# EAGLE board v3-quadcopter-control-board (EAGLE 6.2)
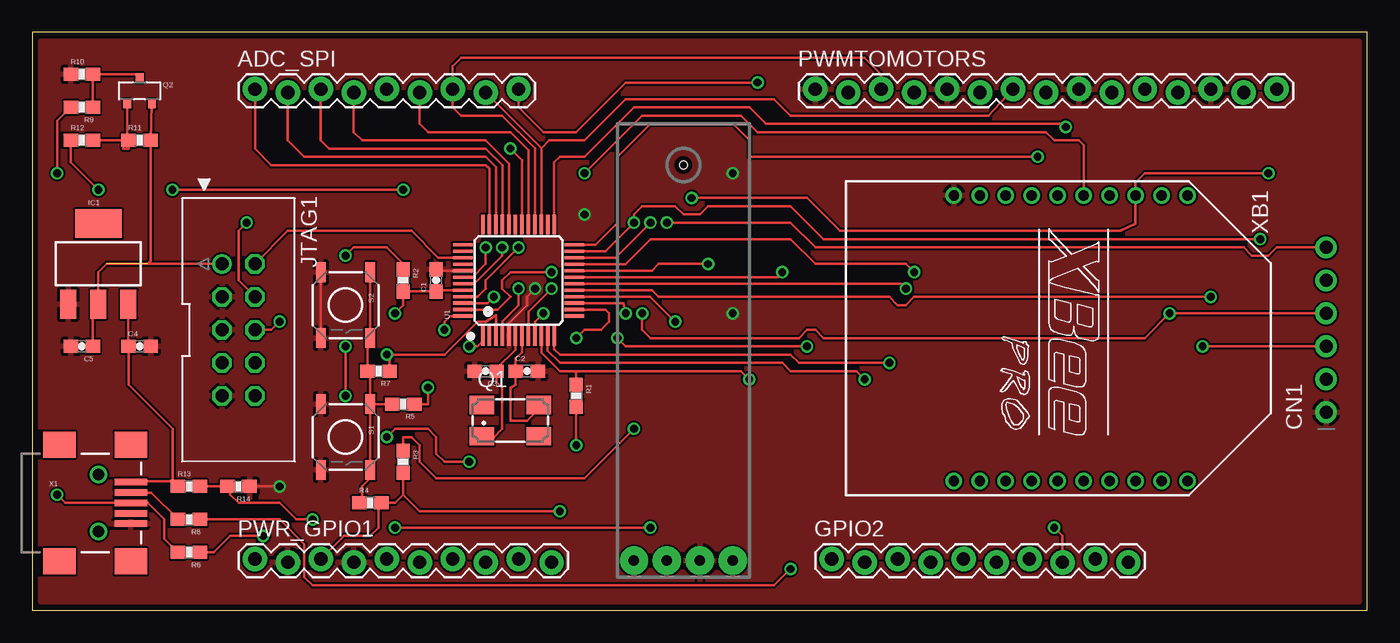
[diagram p0: board, top side]
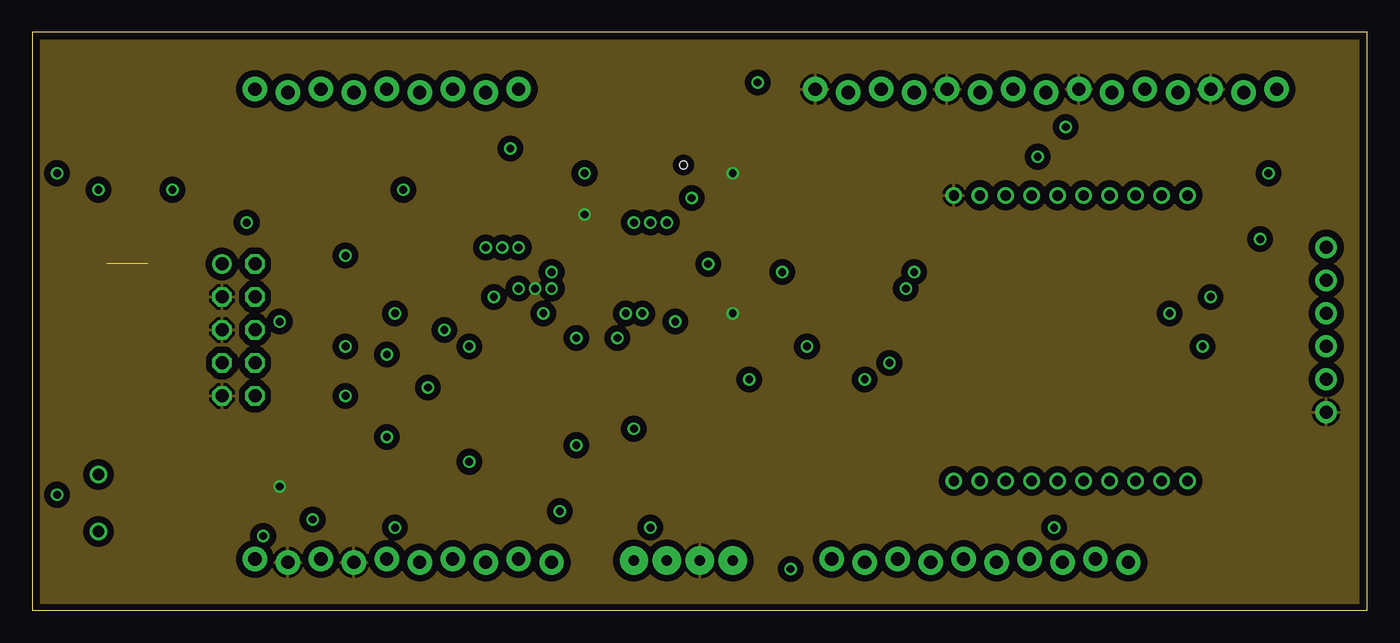
[diagram p1: board, inner layer GND$]
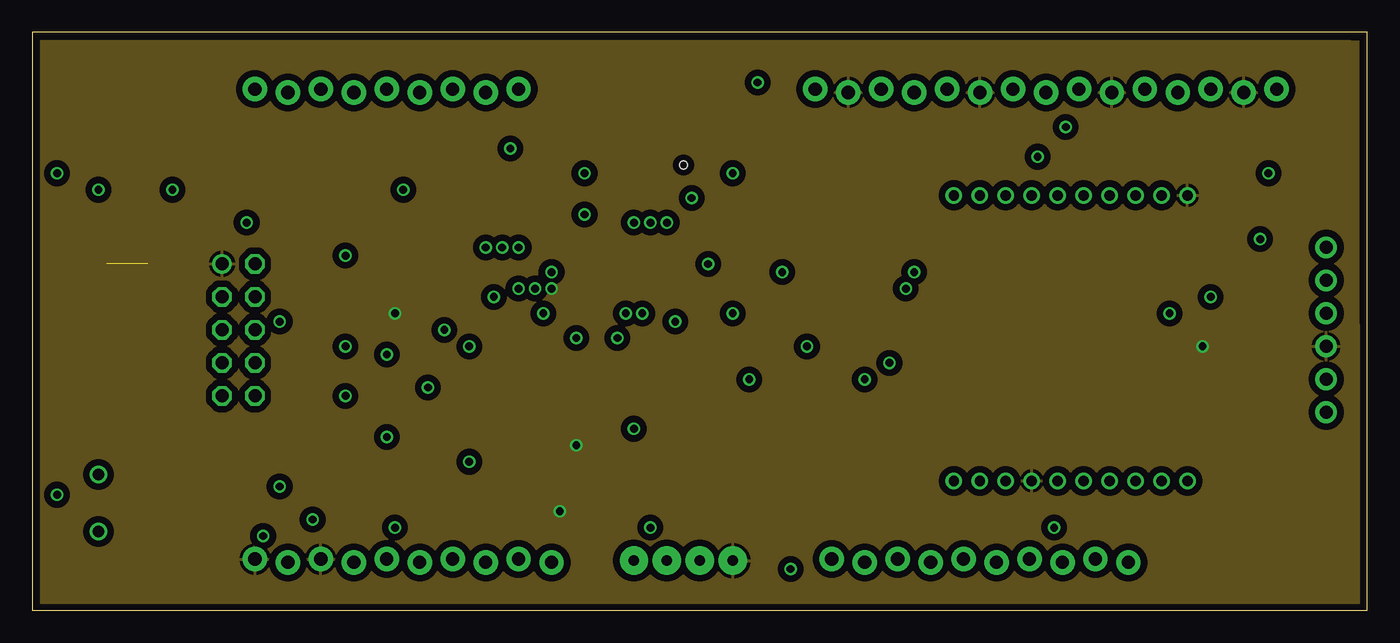
[diagram p2: board, inner layer 3.3V$]
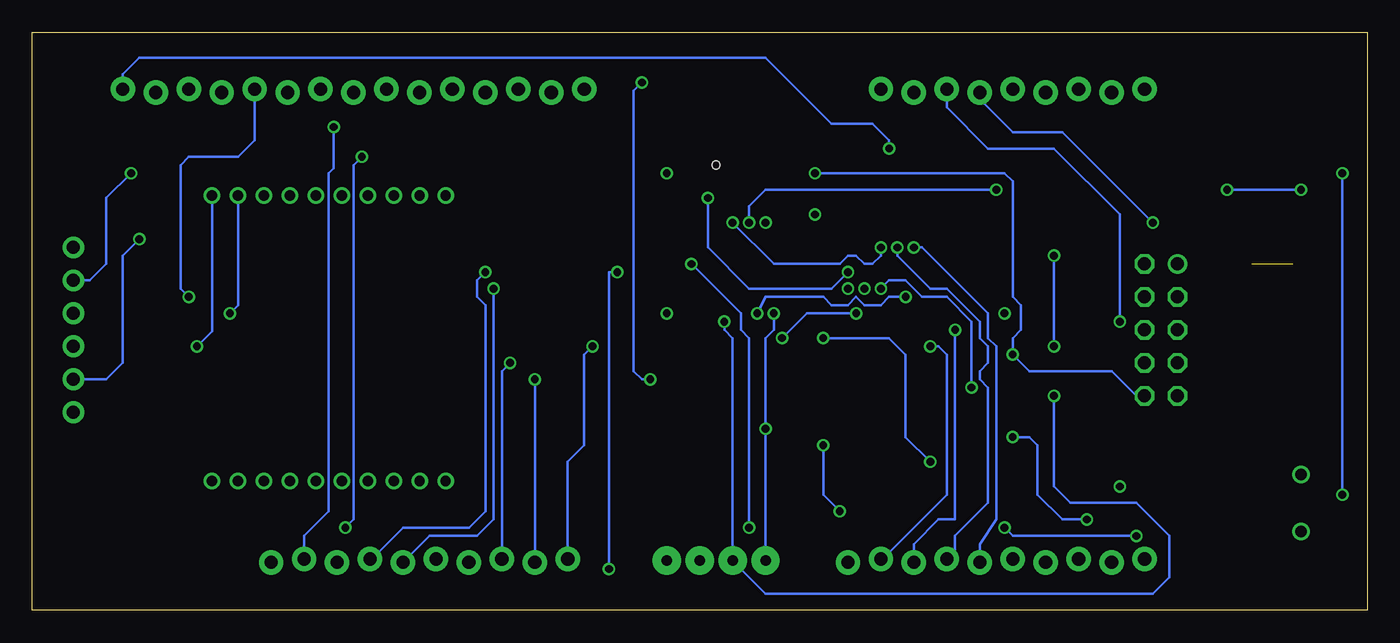
[diagram p3: board, bottom side, seen from below]

Size 102.85 x 44.5 mm. Coordinates in mm from the lower left corner, seen from the top.
Outline: 0,0 102.85,0 102.85,44.5 0,44.5 0,0
Copper layers (1*2)+(3*16): Top 0.0356mm / dielectric 1.5011mm / GND$ 0.0356mm / dielectric 0.1499mm / 3.3V$ 0.0356mm / dielectric 0.2007mm / Bottom 0.0356mm
Design rules: minimum track width 6mil, minimum drill 13mil, track to track 6mil, track to pad 6mil, pad to pad 6mil, via to via 6mil, smd to smd 6mil, copper to edge 15mil, drill to drill 6mil, minimum pad ring 7mil, minimum via ring 7mil, stop-mask expansion 4mil, vias tented up to drill 0mil, thermal gap 10mil

## Footprints (pad centres in the part's own frame; a part is rotated, then mirrored left to right if it is on the bottom)
SPARKFUN-9DOF = drill 0.8 pad 2.184: GND 1.27,3.81; SCL 1.27,8.89; SDA 1.27,6.35; VCC 1.27,1.27 | hole 0.6: 31.75,5.08
1X09_LOCK = drill 1.016 pad 1.88: 1 0,0.127; 2 2.54,-0.127; 3 5.08,0.127; 4 7.62,-0.127; 5 10.16,0.127; 6 12.7,-0.127; 7 15.24,0.127; 8 17.78,-0.127; 9 20.32,0.127
0603-CAP = smd 1.1 x 1: 1 -0.85,0; 2 0.85,0
1X06_ROUND = drill 1 pad 1.676: 1 -6.35,0; 2 -3.81,0; 3 -1.27,0; 4 1.27,0; 5 3.81,0; 6 6.35,0
1X10_LOCK = drill 1.016 pad 1.88: 1 0,0.127; 2 2.54,-0.127; 3 5.08,0.127; 4 7.62,-0.127; 5 10.16,0.127; 6 12.7,-0.127; 7 15.24,0.127; 8 17.78,-0.127; 9 20.32,0.127; 10 22.86,-0.127
SOT223 = smd 1.219 x 2.235: 1 -2.311,-3.099; 2 0,-3.099; 3 2.311,-3.099 | smd 3.6 x 2.2: 4 0,3.099
CORTEXM3_SWD10_MOLEX = drill 1: 1 -5.08,-1.27 | drill 1 octagon: 2 -5.08,1.27; 3 -2.54,-1.27; 4 -2.54,1.27; 5 0,-1.27; 6 0,1.27; 7 2.54,-1.27; 8 2.54,1.27; 9 5.08,-1.27; 10 5.08,1.27
1X15_LOCK = drill 1.016 pad 1.88: 1 0,0.127; 2 2.54,-0.127; 3 5.08,0.127; 4 7.62,-0.127; 5 10.16,0.127; 6 12.7,-0.127; 7 15.24,0.127; 8 17.78,-0.127; 9 20.32,0.127; 10 22.86,-0.127; 11 25.4,0.127; 12 27.94,-0.127; 13 30.48,0.127; 14 33.02,-0.127; 15 35.56,0.127
CTS406 = smd 1.9 x 1.4: 1 -2.2,-1.2; 2 2.2,-1.2; 3 2.2,1.2; 4 -2.2,1.2
SOT23-R = smd 0.6 x 0.7: 1 -0.95,-1; 2 0.95,-1; 3 0,1
0603-RES = smd 1.1 x 1: 1 -0.85,0; 2 0.85,0
TACTILE_SWITCH_SMD = smd 1.524 x 0.762: 1 -2.54,1.905; 2 2.54,1.905; 3 -2.54,-1.905; 4 2.54,-1.905
LQFP48 = smd 1.5 x 0.25: 1 -4.3,2.75; 2 -4.3,2.25; 3 -4.3,1.75; 4 -4.3,1.25; 5 -4.3,0.75; 6 -4.3,0.25; 7 -4.3,-0.25; 8 -4.3,-0.75; 9 -4.3,-1.25; 10 -4.3,-1.75; 11 -4.3,-2.25; 12 -4.3,-2.75; 25 4.3,-2.75; 26 4.3,-2.25; 27 4.3,-1.75; 28 4.3,-1.25; 29 4.3,-0.75; 30 4.3,-0.25; 31 4.3,0.25; 32 4.3,0.75; 33 4.3,1.25; 34 4.3,1.75; 35 4.3,2.25; 36 4.3,2.75 | smd 0.25 x 1.5: 13 -2.75,-4.3; 14 -2.25,-4.3; 15 -1.75,-4.3; 16 -1.25,-4.3; 17 -0.75,-4.3; 18 -0.25,-4.3; 19 0.25,-4.3; 20 0.75,-4.3; 21 1.25,-4.3; 22 1.75,-4.3; 23 2.25,-4.3; 24 2.75,-4.3; 37 2.75,4.3; 38 2.25,4.3; 39 1.75,4.3; 40 1.25,4.3; 41 0.75,4.3; 42 0.25,4.3; 43 -0.25,4.3; 44 -0.75,4.3; 45 -1.25,4.3; 46 -1.75,4.3; 47 -2.25,4.3; 48 -2.75,4.3
USB-MINIB-NOSTOP = smd 2.5 x 0.5: D+ 2.5,0; D- 2.5,0.8; GND 2.5,-1.6; ID 2.5,-0.8; VBUS 2.5,1.6 | smd 2.5 x 2: G1 -3,-4.5; G2 -3,4.5; G3 2.5,4.5; G4 2.5,-4.5 | drill 0.9 pad 0.8: H1 0,2.2 | drill 0.9 pad 0.787: H2 0,-2.2
XBEE-PRO = drill 0.8 pad 1.27: 1 -11,9; 2 -11,7; 3 -11,5; 4 -11,3; 5 -11,1; 6 -11,-1; 7 -11,-3; 8 -11,-5; 9 -11,-7; 10 -11,-9; 11 11,-9; 12 11,-7; 13 11,-5; 14 11,-3; 15 11,-1; 16 11,1; 17 11,3; 18 11,5; 19 11,7; 20 11,9

## Placement (x,y rotation side)
9DOF-SPARKFUN  SEN-10724STD  [SPARKFUN-9DOF]  55.24,2.54 90 top
ADC_SPI  M09LOCK  [1X09_LOCK]  17.14,40.01 0 top
C1  10uF  [0603-CAP]  31.11,25.4 90 top
C2  16pF  [0603-CAP]  38.1,18.41 0 top
C3  16pF  [0603-CAP]  34.92,18.41 180 top
C4  16pF  [0603-CAP]  8.26,20.32 0 top
C5  16pF  [0603-CAP]  3.81,20.32 180 top
CN1  [1X06_ROUND]  99.69,21.59 90 top
GPIO2  M10LOCK  [1X10_LOCK]  61.59,3.81 0 top
IC1  [SOT223]  5.08,26.67 0 top
JTAG1  JTAG  [CORTEXM3_SWD10_MOLEX]  15.88,21.59 270 top
PWMTOMOTORS  M15LOCK  [1X15_LOCK]  60.33,40.01 0 top
PWR_GPIO1  M10LOCK  [1X10_LOCK]  17.14,3.81 0 top
Q1  12MHz  [CTS406]  36.83,14.61 0 top
Q2  [SOT23-R]  8.26,40.01 0 top
R1  10k  [0603-RES]  41.91,16.51 270 top
R2  10k  [0603-RES]  28.57,25.4 270 top
R3  10k  [0603-RES]  28.57,11.43 270 top
R4  10k  [0603-RES]  26.04,8.26 0 top
R5  470  [0603-RES]  28.57,15.88 180 top
R6  33  [0603-RES]  12.06,4.45 180 top
R7  470  [0603-RES]  26.67,18.41 180 top
R8  33  [0603-RES]  12.06,6.99 180 top
R9  1.5k  [0603-RES]  3.81,38.73 180 top
R10  150  [0603-RES]  3.81,41.27 0 top
R11  10k  [0603-RES]  8.26,36.2 0 top
R12  2k  [0603-RES]  3.81,36.2 0 top
R13  10k  [0603-RES]  12.06,9.53 0 top
R14  100k  [0603-RES]  15.88,9.53 180 top
S1  RESET  [TACTILE_SWITCH_SMD]  24.13,13.34 270 top
S2  ISP  [TACTILE_SWITCH_SMD]  24.13,23.5 270 top
U1  [LQFP48]  37.47,25.4 90 top
X1  USB-SMD-NS  [USB-MINIB-NOSTOP]  5.08,8.26 0 top
XB1  XBEE-PRO  [XBEE-PRO]  80.01,20.95 270 top

## Library data of the parts
9DOF-SPARKFUN = wicker
ADC_SPI C1-C5 GPIO2 IC1 PWMTOMOTORS PWR_GPIO1 R1-R14 S1 S2 X1 = sparkfun
CN1 JTAG1 Q2 XB1 = microbuilder
Q1 = crystal
U1 = microbuilder; DIGIKEY#: 568-4945-ND; MANF: NXP; MANF#: LPC1343FBD48,151

## Nets
3.3V: 9DOF-SPARKFUN.VCC C1.1 C5.1 CN1.3 IC1.2 JTAG1.1 PWMTOMOTORS.2 PWMTOMOTORS.6 PWMTOMOTORS.10 PWMTOMOTORS.14 PWR_GPIO1.1 PWR_GPIO1.3 Q2.2 R1.2 R2.2 R3.2 R4.2 R11.2 U1.8 U1.44 XB1.1 XB1.14
5V: C4.1 IC1.3 R13.1 X1.VBUS
AD0: ADC_SPI.4 U1.32
AD1: ADC_SPI.3 U1.33
AD2: ADC_SPI.2 U1.34
AD3: ADC_SPI.1 U1.35
CTS: CN1.2 U1.23
GND: 9DOF-SPARKFUN.GND C1.2 C2.2 C3.2 C4.2 C5.2 CN1.1 IC1.1 JTAG1.3 JTAG1.5 JTAG1.9 PWMTOMOTORS.1 PWMTOMOTORS.5 PWMTOMOTORS.9 PWMTOMOTORS.13 PWR_GPIO1.2 PWR_GPIO1.4 R10.1 R14.1 S1.3 S1.4 S2.3 S2.4 U1.5 U1.41 X1.GND XB1.10
ISP: R5.1 U1.4
MISO: ADC_SPI.8 PWMTOMOTORS.7 U1.27
MOSI: ADC_SPI.7 JTAG1.6 PWMTOMOTORS.3 U1.28
N$1: R6.2 R9.2 X1.D+
N$2: R8.2 X1.D-
N$4: Q2.3 R9.1 R10.2
N$5: Q2.1 R11.1 R12.2
N$7: R4.1 R5.2 R7.2 S1.1 S1.2 S2.1 S2.2
PIO1_8: GPIO2.1 U1.9
PIO1_11: PWR_GPIO1.6 U1.42
PIO2_4: GPIO2.6 U1.18
PIO2_5: GPIO2.7 U1.21
PIO2_6: PWR_GPIO1.9 U1.1
PIO2_7: GPIO2.2 U1.11
PIO2_8: GPIO2.3 U1.12
PIO2_9: GPIO2.8 U1.24
PIO2_10: GPIO2.9 U1.25
PIO3_2: PWR_GPIO1.7 U1.43
PIO3_3: PWR_GPIO1.8 U1.48
PWM_C: PWMTOMOTORS.11 U1.17
PWM_D: PWMTOMOTORS.15 U1.30
RESET: JTAG1.10 R7.1 U1.3 XB1.5
RTS: CN1.6 U1.45
RXD: CN1.4 U1.46 XB1.2
SCL: 9DOF-SPARKFUN.SCL R3.1 U1.15
SDA: 9DOF-SPARKFUN.SDA R2.1 U1.16
SSEL: ADC_SPI.9 R1.1 U1.10
SWCLK: ADC_SPI.6 JTAG1.4 U1.29
SWD: JTAG1.2 U1.39
TXD: CN1.5 U1.47 XB1.3
USB_D+: R6.1 U1.20
USB_D-: R8.1 U1.19
USBCON: R12.1 U1.22
USBVBUS: R13.2 R14.2 U1.14
XTAL1: C3.1 Q1.1 U1.6
XTAL2: C2.1 Q1.3 U1.7

## Tracks (layer width: path | path; a pad name or v marks a point on that pad's centre or on a via)
3.3V  (via drill 0.6)  (1 unrouted)
  Top 0.203: v41.91,12.7 R1.2 | R4.2 27.94,8.26 28.57,8.89 | 28.57,8.89 R3.2 | PWR_GPIO1.3 24,5.71 26.04,5.71 26.67,6.35 26.67,8.04 | Q2.2 R11.2 9.11,26.89 8.89,26.67 | C5.1 4.66,23.15 IC1.2 5.08,26.04 5.71,26.67 8.89,26.67 | JTAG1.1 8.89,26.67 | v40.64,7.62 29.84,7.62 28.57,8.89 | v27.94,22.86 28.57,23.5 R2.2 C1.1 31.21,24.65 U1.44 | v90.17,20.32 CN1.3 | U1.8 38.22,22.98 v40.01,24.77
  Bottom 0.203: v41.91,12.7 41.91,8.89 v40.64,7.62 | XB1.1 89.01,21.48 v90.17,20.32
  pour 3.3V$ (isolate 0.508): 0.64,0.34 102.23,0.34 102.22,43.8 101.6,43.81 0.64,43.87
5V
  Top 0.203: IC1.3 7.39,20.33 C4.1 7.41,17.36 10.79,13.97 10.79,9.95 | 10.79,9.95 R13.1 10.88,9.86 | 10.79,9.95 7.67,9.95 X1.VBUS
AD0
  Top 0.203: U1.32 36.72,34.41 34.92,36.2 25.4,36.2 24.77,36.83 ADC_SPI.4
AD1
  Top 0.203: U1.33 36.22,34.27 34.92,35.56 22.86,35.56 22.23,36.2 ADC_SPI.3
AD2
  Top 0.203: U1.34 35.72,34.13 34.92,34.92 20.95,34.92 19.68,36.2 ADC_SPI.2
AD3
  Top 0.203: ADC_SPI.1 17.14,35.56 18.41,34.29 34.92,34.29 35.22,34 U1.35
CTS  (via drill 0.6)
  Top 0.203: U1.23 44.16,27.65 v46.35,29.84 46.35,30.48 46.99,31.11 49.53,31.11 50.16,30.48 51.44,30.48 52.07,31.11 58.42,31.11 60.96,28.57 v94.61,28.57
  Bottom 0.203: v94.61,28.57 95.89,27.3 95.89,19.05 97.16,17.78 CN1.2
GND  (via drill 0.6, 0.6 pad 0.2)
  Top 0.203: C1.2 31.21,26.15 U1.41 31,26.15 | S2.4 S2.3 | U1.5 36.72,22.11 38.1,23.5 38.1,24.13 v38.73,24.77 | R14.1 v19.05,9.53
  other vias: 53.98,33.66 53.98,22.86 42.55,30.48
  pour Top: 0.64,43.81 102.23,43.81 102.23,0.64 0.64,0.64
  pour GND$ (isolate 0.508): 0.64,0.34 102.22,0.34 102.22,43.87 0.64,43.87
ISP  (via drill 0.6)
  Top 0.203: v30.48,17.14 30.48,15.88 R5.1 | U1.4 36.22,22.25 37.47,23.5 v37.47,24.77
  Bottom 0.203: v30.48,17.14 30.48,22.23 32.38,24.13 34.29,24.13 35.56,25.4 36.83,25.4 v37.47,24.77
MISO
  Top 0.203: 39.22,35.59 U1.27 | 39.22,35.59 ADC_SPI.8 | PWMTOMOTORS.7 73.66,38.1 58.42,38.1 57.15,39.37 45.72,39.37 42.55,36.2 39.82,36.2 39.22,35.59
MOSI  (via drill 0.6)
  Top 0.203: U1.28 38.72,35.58 36.2,38.1 33.02,38.1 32.38,38.73 ADC_SPI.7 32.38,41.91 33.02,42.55 64.14,42.55 65.41,41.27 PWMTOMOTORS.3 | JTAG1.6 18.41,21.59 v19.05,22.23
  Bottom 0.203: v19.05,22.23 19.05,30.48 24.13,35.56 29.21,35.56 32.38,38.73 ADC_SPI.7
N$1  (via drill 0.6)
  Top 0.203: R6.2 10.16,5.5 10.16,6.99 8.89,8.26 X1.D+ 2.54,8.26 v1.91,8.89 | v1.91,33.66 1.91,37.68 R9.2
  Bottom 0.203: v1.91,8.89 v1.91,33.66
N$2
  Top 0.203: X1.D- 9.14,9.05 R8.2
N$4
  Top 0.203: Q2.3 8.26,41.27 R10.2 R9.1
N$5
  Top 0.203: R12.2 6.99,36.2 6.99,35.56 7.41,35.56 | 7.41,35.56 R11.1 | Q2.1 7.3,35.66 7.41,35.56
N$7
  Top 0.203: R4.1 25.4,8.47 25.4,9.53 26.04,10.16 S1.2 S1.1 | S1.1 26.04,18.2 R7.2 25.82,20.74 S2.2 S2.1 | S1.1 R5.2
PIO1_8  (via drill 0.6)
  Top 0.203: U1.9 38.72,22.2 v39.37,22.86 | v45.09,20.95 45.72,20.32 v59.69,20.32
  Bottom 0.203: GPIO2.1 61.59,11.43 60.33,12.7 60.33,19.68 v59.69,20.32 | v39.37,22.86 43.18,22.86 v45.09,20.95
PIO1_11  (via drill 0.6)
  Top 0.203: U1.42 33.91,25.65 34.92,26.67 v34.92,27.94
  Bottom 0.203: v34.92,27.94 34.29,27.94 29.21,22.86 29.21,20.95 28.57,20.32 28.57,6.99 29.84,5.08 PWR_GPIO1.6
PIO2_4  (via drill 0.6)
  Top 0.203: U1.18 66.92,25.15 v67.31,24.77
  Bottom 0.203: v67.31,24.77 67.31,6.99 68.58,5.71 72.26,5.71 GPIO2.6
PIO2_5  (via drill 0.6)
  Top 0.203: U1.21 45.7,26.65 47.62,28.57 58.42,28.57 60.33,26.67 67.31,26.67 v67.94,26.04
  Bottom 0.203: GPIO2.7 76.71,3.94 74.3,6.35 69.22,6.35 67.94,7.62 67.94,23.5 68.58,24.13 68.58,25.4 v67.94,26.04
PIO2_6  (via drill 0.6)
  Top 0.203: U1.1 34.72,20.75 34.29,20.32 v33.66,20.32
  Bottom 0.203: PWR_GPIO1.9 37.34,3.94 32.38,8.89 32.38,19.68 33.02,20.32 v33.66,20.32
PIO2_7  (via drill 0.6)
  Top 0.203: U1.11 39.72,19.98 40.64,19.05 57.78,19.05 58.42,18.41 63.5,18.41 v64.14,17.78
  Bottom 0.203: v64.14,17.78 GPIO2.2
PIO2_8  (via drill 0.6)
  Top 0.203: U1.12 40.22,20.11 40.64,19.68 58.42,19.68 59.05,19.05 v66.04,19.05
  Bottom 0.203: v66.04,19.05 66.67,18.41 GPIO2.3
PIO2_9  (via drill 0.6)
  Top 0.203: U1.24 43.39,28.15 45.09,29.84 45.09,34.92 47.62,37.47 53.98,37.47 55.24,36.2 55.24,34.92 v77.47,34.92 | GPIO2.8 79.38,5.71 v78.74,6.35
  Bottom 0.203: v78.74,6.35 78.11,6.99 78.11,34.29 v77.47,34.92
PIO2_10  (via drill 0.6)
  Top 0.203: U1.25 40.22,34.5 40.64,34.92 42.55,34.92 46.35,38.73 55.24,38.73 56.52,37.47 79.38,37.47 v79.63,37.21
  Bottom 0.203: v79.63,37.21 79.63,34.04 80.01,33.66 80.01,7.62 81.92,5.71 GPIO2.9
PIO3_2  (via drill 0.6)
  Top 0.203: U1.43 34.04,25.15 36.2,27.3 v36.2,27.94
  Bottom 0.203: v36.2,27.94 36.2,27.3 33.66,24.77 32.38,24.77 29.84,22.23 29.84,20.95 29.21,20.32 29.21,19.05 29.84,18.41 29.84,17.78 29.21,17.14 29.21,8.26 31.75,5.71 31.75,4.57 PWR_GPIO1.7
PIO3_3  (via drill 0.6)
  Top 0.203: U1.48 32.17,22.65 31.75,22.23 v31.75,21.59
  Bottom 0.203: v31.75,21.59 31.75,6.99 33.02,6.99 34.92,5.08 PWR_GPIO1.8
PWM_C  (via drill 0.6)
  Top 0.203: U1.17 47.74,24.65 48.26,24.13 66.04,24.13 66.67,23.5 67.31,23.5 67.94,24.13 83.82,24.13 84.45,24.13 v90.81,24.13
  Bottom 0.203: PWMTOMOTORS.11 85.72,36.2 87,34.92 90.81,34.92 91.44,34.29 91.44,24.77 v90.81,24.13
PWM_D  (via drill 0.6)
  Top 0.203: U1.30 37.72,34.67 v36.83,35.56
  Bottom 0.203: v36.83,35.56 36.83,36.2 38.1,37.47 41.27,37.47 46.35,42.55 94.61,42.55 95.89,41.27 PWMTOMOTORS.15
RESET  (via drill 0.6)
  Top 0.203: R7.1 27.52,19.47 v27.3,19.68 31.75,19.68 34.29,22.23 34.92,22.23 35.72,22.7 U1.3 | XB1.5 81.01,35.83 80.64,36.2 78.74,36.2 78.11,36.83 55.88,36.83 54.61,38.1 46.99,38.1 v42.55,33.66
  Bottom 0.203: JTAG1.10 17.78,16.51 19.68,18.41 26.04,18.41 v27.3,19.68 27.3,20.95 26.67,21.59 26.67,23.5 27.3,24.13 27.3,33.02 27.94,33.66 v42.55,33.66
RTS  (via drill 0.6)
  Top 0.203: CN1.6 95.89,27.94 95.25,27.3 93.98,27.3 93.34,27.94 60.33,27.94 58.42,29.84 v48.9,29.84 | U1.45 34.31,24.15 34.92,24.77 34.92,25.4 v37.47,27.94
  Bottom 0.203: v37.47,27.94 37.47,27.3 38.1,26.67 38.73,26.67 39.37,27.3 40.01,27.3 40.64,26.67 45.72,26.67 v48.9,29.84
RXD  (via drill 0.6)
  Top 0.203: CN1.4 v87.63,22.86 85.72,20.95 60.96,20.95 60.33,21.59 59.69,21.59 59.05,20.95 47.62,20.95 46.99,21.59 v46.99,22.86 | U1.46 35.08,23.65 v35.56,24.13
  Bottom 0.203: XB1.2 87.01,23.48 v87.63,22.86 | v35.56,24.13 36.83,24.13 37.47,23.5 38.73,23.5 39.37,24.13 40.01,23.5 41.27,23.5 41.91,24.13 46.35,24.13 v46.99,22.86
SCL  (via drill 0.6)
  Top 0.203: U1.15 45.56,23.65 v45.72,22.86 | R3.1 28.57,13.34 29.21,13.34 29.84,12.7 29.84,11.43 31.11,10.16 42.55,10.16 v46.35,13.97
  Bottom 0.203: 9DOF-SPARKFUN.SCL v46.35,13.97 46.35,20.95 45.72,21.59 v45.72,22.86
SDA  (via drill 0.6)
  Top 0.203: U1.16 47.6,24.15 v49.53,22.23 | R2.1 28.57,26.67 27.3,27.94 24.77,27.94 v24.13,27.3 | v24.13,20.32 v24.13,16.51
  Bottom 0.203: v49.53,22.23 49.53,21.59 48.9,20.95 9DOF-SPARKFUN.SDA 46.35,1.27 16.51,1.27 15.24,2.54 15.24,5.71 17.78,8.26 22.86,8.26 24.13,9.53 v24.13,16.51 | v24.13,27.3 v24.13,20.32
SSEL  (via drill 0.6)
  Top 0.203: 41.91,18.41 54.61,18.41 v55.24,17.78 | ADC_SPI.9 37.47,38.73 39.37,36.83 41.91,36.83 45.72,40.64 v55.88,40.64 | U1.10 39.22,19.84 40.64,18.41 41.91,18.41 | R1.1 41.91,18.41
  Bottom 0.203: v55.24,17.78 55.88,17.78 56.52,18.41 56.52,40.01 v55.88,40.64
SWCLK  (via drill 0.6)
  Top 0.203: U1.29 38.22,35.45 36.83,36.83 30.48,36.83 29.84,37.47 ADC_SPI.6 | JTAG1.4 15.88,25.4 15.88,29.21 v16.51,29.84
  Bottom 0.203: v16.51,29.84 23.5,36.83 27.3,36.83 29.84,39.37 ADC_SPI.6
SWD
  Top 0.203: U1.39 31.27,27.15 29.21,29.21 19.68,29.21 JTAG1.2
TXD  (via drill 0.6)
  Top 0.203: v95.25,33.66 85.72,33.66 85.01,32.94 XB1.3 85.01,29.77 83.82,29.21 62.23,29.21 59.69,31.75 v50.8,31.75 | U1.47 35.85,23.15 36.83,24.13 36.2,24.77 36.2,25.4 36.83,26.04 v40.01,26.04
  Bottom 0.203: v40.01,26.04 41.27,24.77 47.62,24.77 50.8,27.94 v50.8,31.75 | v95.25,33.66 97.16,31.75 97.16,26.67 98.42,25.4 CN1.5
USB_D+  (via drill 0.6)
  Top 0.203: U1.20 46.47,26.15 47.74,26.15 48.26,26.67 v52.07,26.67 | R6.1 13.97,4.45 15.24,5.71 v17.78,5.71 | v27.94,6.35 v47.62,6.35
  Bottom 0.203: v17.78,5.71 27.3,5.71 v27.94,6.35 | v47.62,6.35 47.62,20.95 48.26,21.59 48.26,22.86 v52.07,26.67
USB_D-  (via drill 0.6)
  Top 0.203: R8.1 19.05,6.99 20.95,5.08 20.95,2.54 21.59,1.91 57.15,1.91 v58.42,3.17 | U1.19 57.4,25.65 v57.78,26.04
  Bottom 0.203: v58.42,3.17 58.42,26.04 v57.78,26.04
USBCON  (via drill 0.6)
  Top 0.203: R12.1 2.96,34.51 v5.08,32.38 | U1.22 44.93,27.15 v47.62,29.84 | v28.57,32.38 v10.79,32.38
  Bottom 0.203: v28.57,32.38 46.35,32.38 47.62,31.11 v47.62,29.84 | v10.79,32.38 v5.08,32.38
USBVBUS  (via drill 0.6)
  Top 0.203: R13.2 R14.2 15.24,9.31 15.24,8.89 15.88,8.26 19.05,8.26 20.32,6.99 v21.59,6.99 | U1.14 44.16,23.15 44.45,22.86 44.45,22.23 43.81,21.59 42.55,21.59 v41.91,20.95 | v33.66,11.43 31.75,11.43 31.11,12.06 31.11,13.34 30.48,13.97 27.94,13.97 v27.3,13.34
  Bottom 0.203: v41.91,20.95 36.83,20.95 35.56,19.68 35.56,13.34 v33.66,11.43 | v27.3,13.34 26.04,13.34 25.4,12.7 25.4,8.89 23.5,6.99 v21.59,6.99
XTAL1
  Top 0.203: Q1.1 34.7,13.34 35.56,13.34 36.2,13.97 36.2,17.14 35.77,17.57 C3.1 35.77,18.63 37.22,20.07 U1.6
XTAL2
  Top 0.203: 38.95,15.88 Q1.3 39.03,15.54 38.1,14.61 36.83,14.61 36.83,17.14 37.25,17.36 C2.1 37.25,19.39 37.72,19.86 U1.7